# Altium PCB Notecarier-F.PcbDoc (part 1 of 3)
Units mm, origin at the board's own origin, x right, y up, seen from the top; angles counter-clockwise.
Board outline 50.8 x 103 mm, 4 copper layers (Top Layer, Mid Layer 3, Mid Layer 4, Bottom Layer), stack 1.58 mm thick; 105 components, 115 nets, 561 pads, 506 vias.
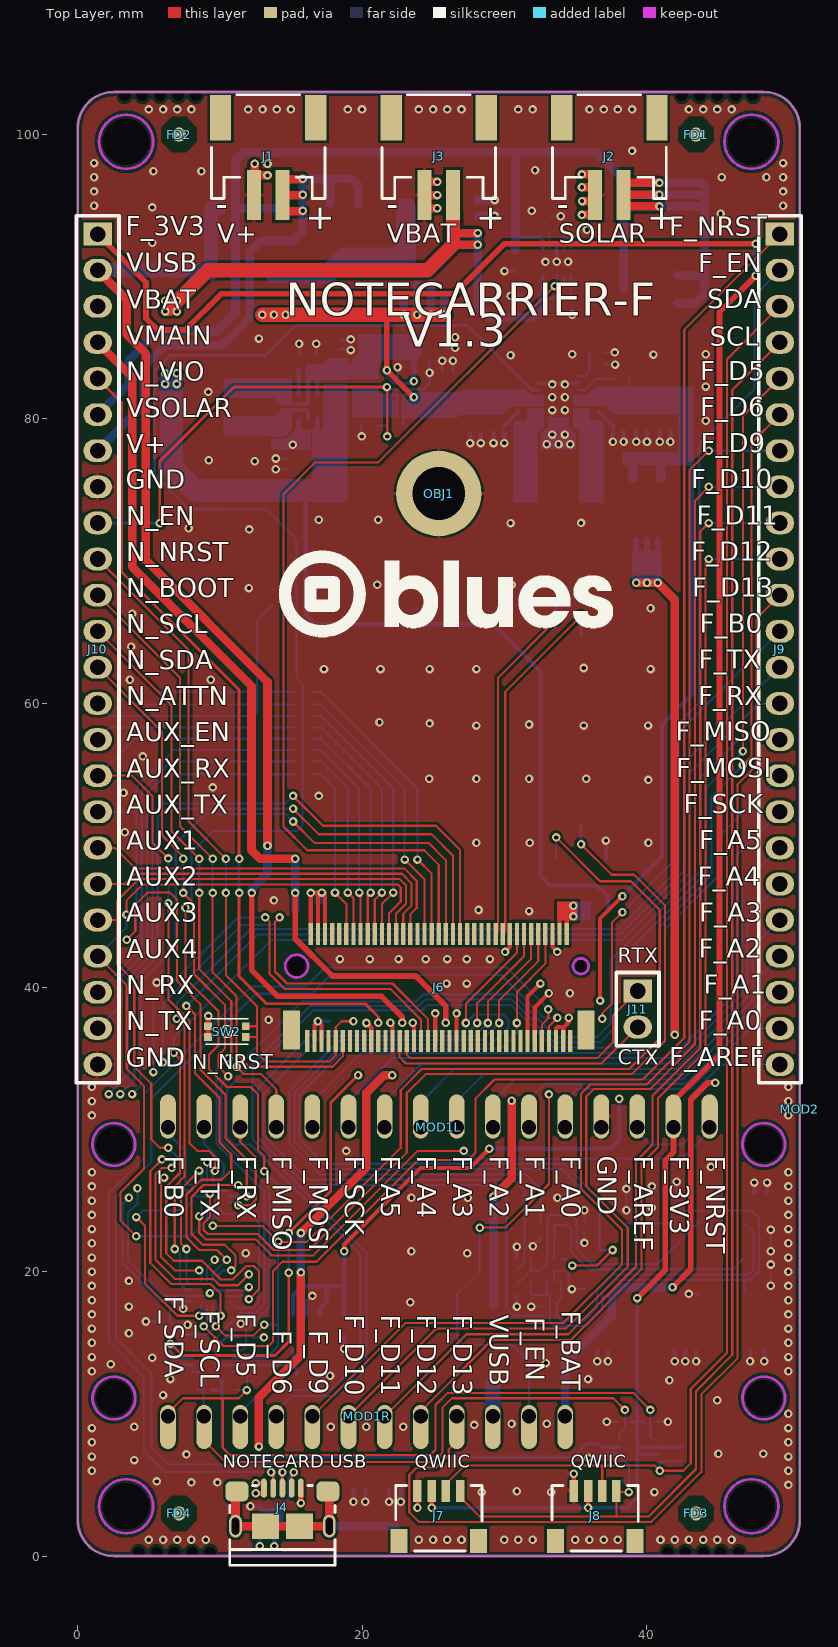
[diagram p0: Top Layer view]
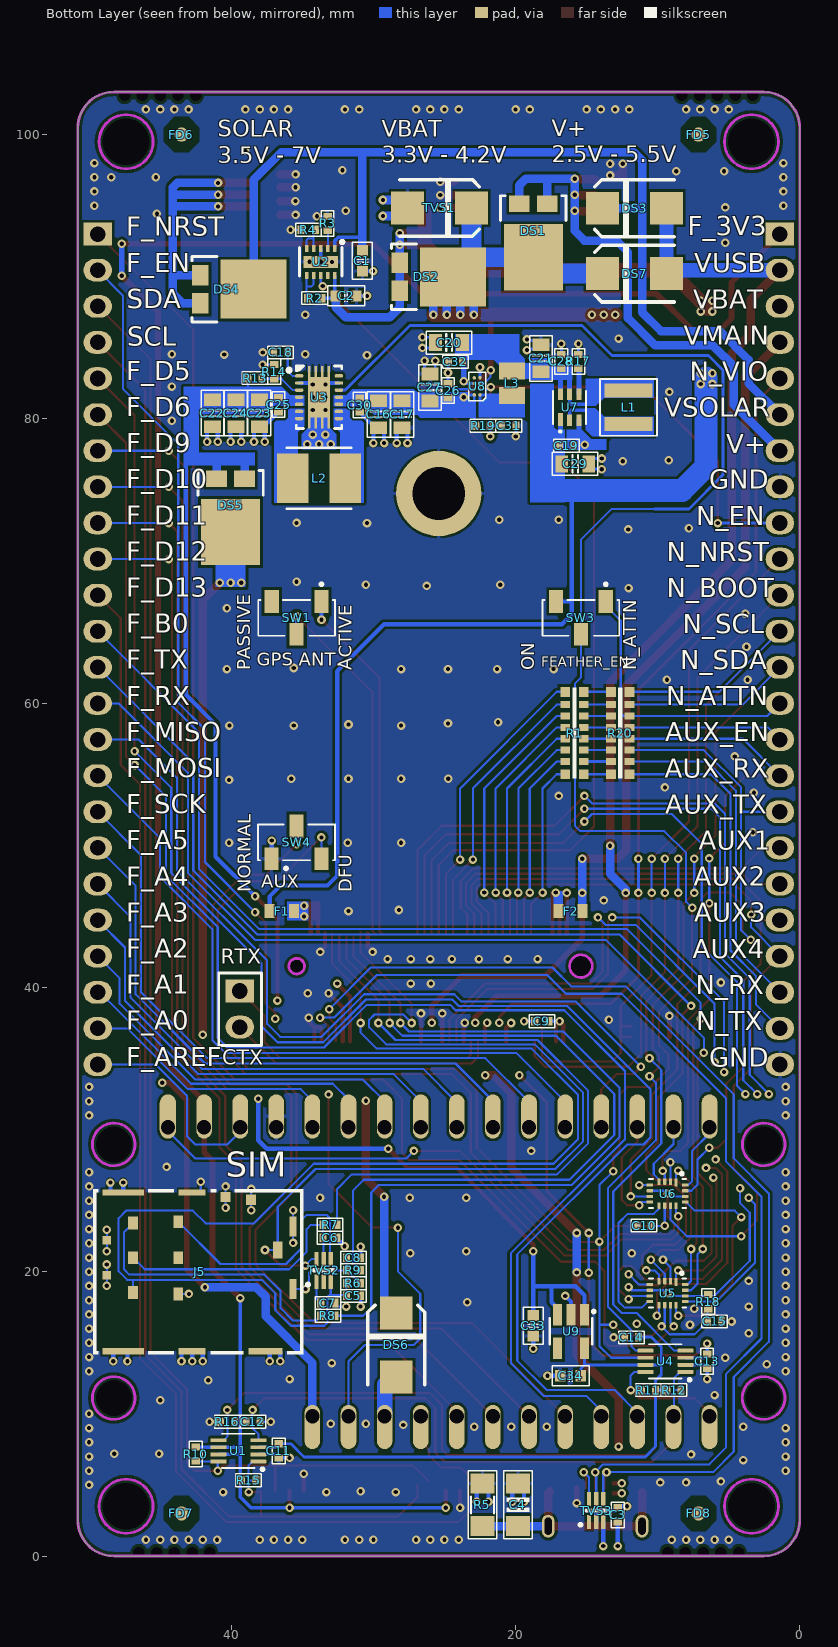
[diagram p1: Bottom Layer view, seen from below]
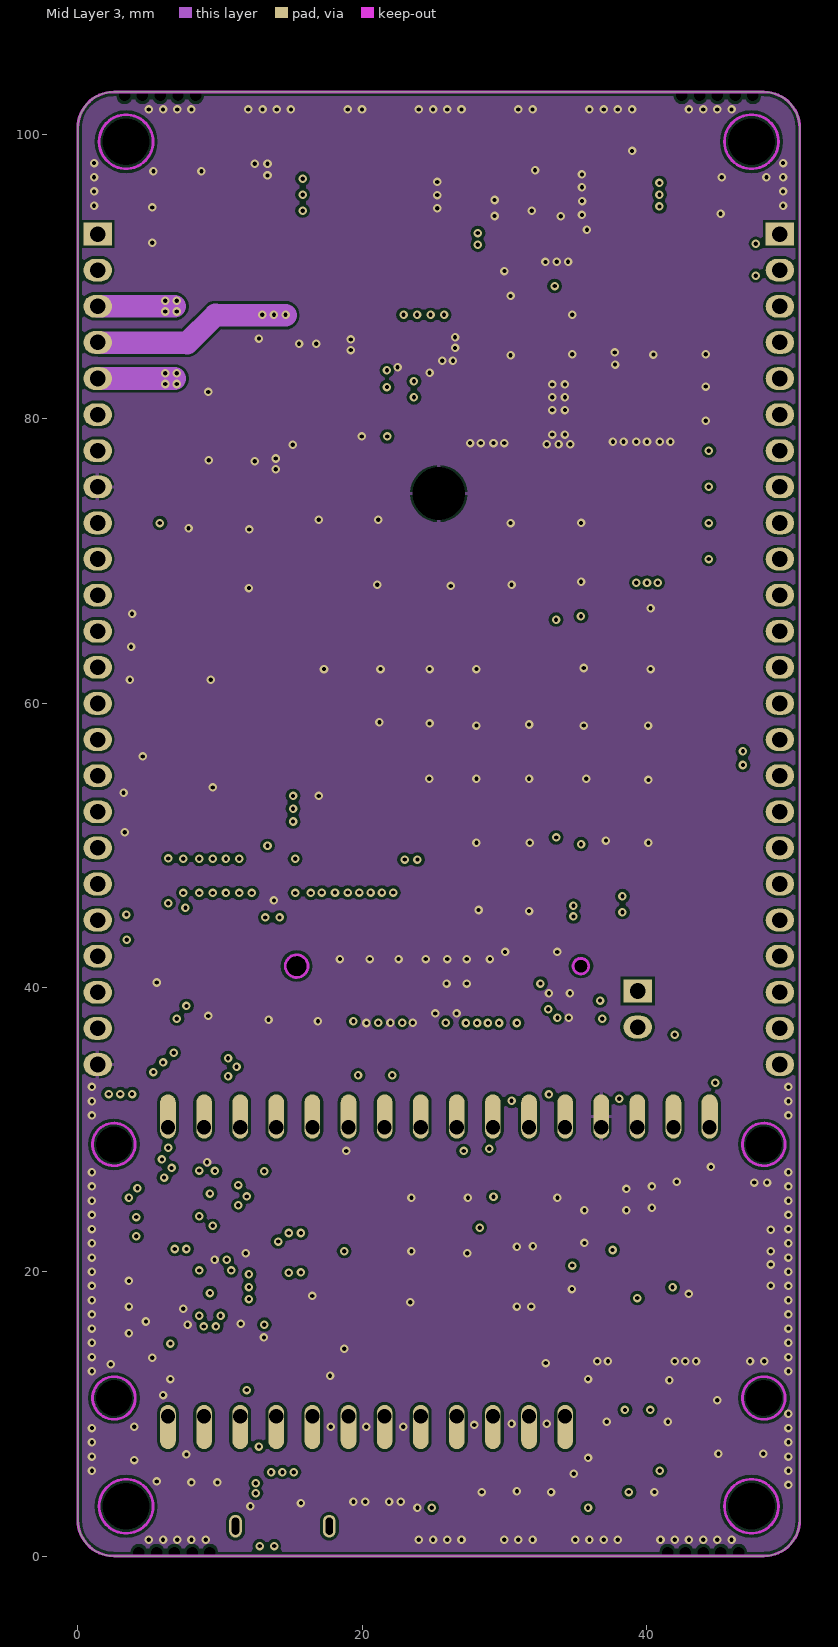
[diagram p2: Mid Layer 3]
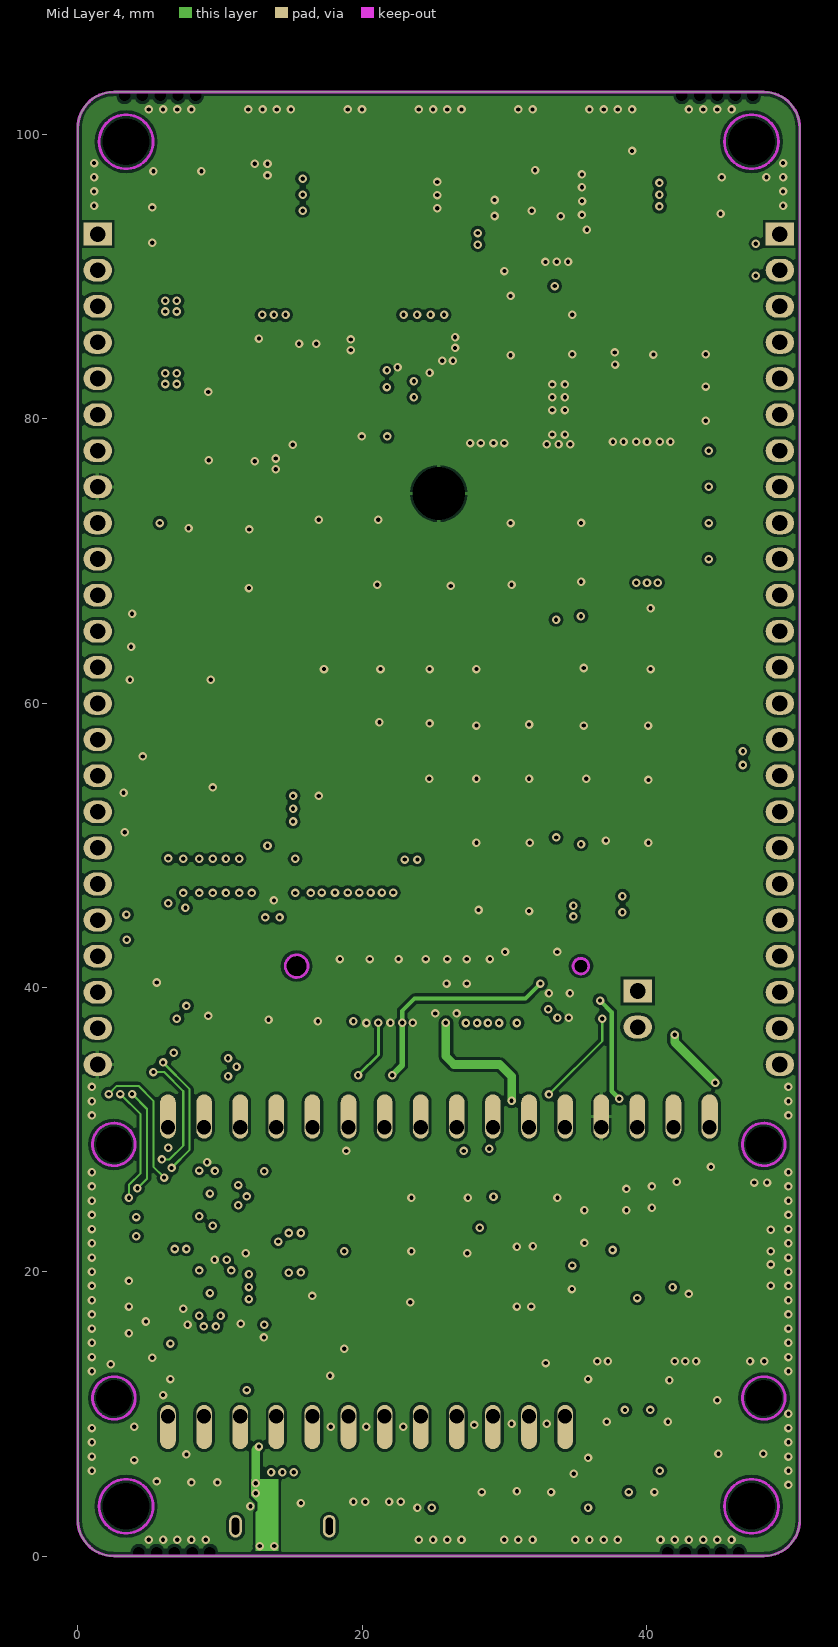
[diagram p3: Mid Layer 4]

## Layer stack, top to bottom
Top Solder: solder mask 0.0152, Solder Resist, Dk 3.5
Top Layer: signal copper 0.0483
Top Prepreg: prepreg 0.1092, Dk 4.2
Mid Layer 3: signal copper 0.0356
Bottom Core: core 1.1938, Dk 4.2
Mid Layer 4: signal copper 0.0356
Bottom Prepreg: prepreg 0.1092, Dk 4.2
Bottom Layer: signal copper 0.0483
Bottom Solder: solder mask 0.0152, Solder Resist, Dk 3.5

## Board outline
0,2.54 ccw(c2.54,2.54) 2.54,0 48.26,0 ccw(c48.26,2.54) 50.8,2.54 50.8,100.46 ccw(c48.26,100.46) 48.26,103 2.54,103 ccw(c2.54,100.46) 0,100.46

## Design rules (kind name [scope] priority, off if disabled: settings)
Clearance "Clearance Polygon" [InPoly] p1: gap=0.2
Clearance [All] p2: gap=0.1
ComponentClearance ComponentClearance_SidePins [HasFootprint('PCB_Contact_side_0.7mm') vs HasFootprint('PCB_Contact_side_0.7mm')] p1: gap=0 collisioncheckmode=3 verticalgap=0 showdistances=FALSE
ComponentClearance ComponentClearance_GNSSantenna [InComponent('R38') vs InComponent('ANT3')] p2: gap=0 collisioncheckmode=3 verticalgap=0 showdistances=FALSE
ComponentClearance ComponentClearance_SW_jumper [InComponent('R28') vs InComponent('S1')] p3: gap=0 collisioncheckmode=3 verticalgap=0 showdistances=FALSE
ComponentClearance ComponentClearance_Shield [InComponent('SHIELD1')] p4: gap=0 collisioncheckmode=3 verticalgap=0 showdistances=FALSE
ComponentClearance ComponentClearance_PCBAntena [(HasFootprint('ANTENNA 2.4 GHZ PCB MICRO SIZE') or HasFootprint('Fiducial mark 1mm'))] p5: gap=0 collisioncheckmode=3 verticalgap=0 showdistances=FALSE
ComponentClearance [All] p6: gap=0.1 collisioncheckmode=3 verticalgap=0.254 showdistances=FALSE
DiffPairsRouting [All] p1: maxlimit=0.229 minlimit=0.127 mostfreqgap=0.229 toplayer_mingap=0.229 toplayer_minwidth=0.178 toplayer_maxwidth=0.178 toplayer_prefwidth=0.178 midlayer1_maxgap=0.127 midlayer1_prefgap=0.127 midlayer1_minwidth=0.084 midlayer1_maxwidth=0.084 midlayer1_prefwidth=0.084 midlayer2_maxgap=0.127 midlayer2_prefgap=0.127 midlayer2_minwidth=0.084 midlayer2_maxwidth=0.084 midlayer2_prefwidth=0.084 bottomlayer_mingap=0.229 bottomlayer_minwidth=0.178 bottomlayer_maxwidth=0.178 bottomlayer_prefwidth=0.178 maxuncoupledlength=12.7
FabricationTestPointUsage TestPointUsage [All] p1: valid=0 allowmultiple=FALSE
FabricationTestpoint Testpoint [All] p1: side=3 testpointundercomponent=TRUE minsize=1.016 maxsize=2.54 preferedsize=1.524 minholesize=0 maxholesize=1.016 preferedholesize=0.813 testpointgrid=0.025 allowsidetop=TRUE allowsidebottom=TRUE usegrid=TRUE gridtolerance=0
HoleSize [All] p1: absolutevalues=TRUE maxlimit=5.08 minlimit=0.1 maxpercent=80.000 minpercent=20.000
HoleToHoleClearance [All] p1: gap=0.2 allowstackedmicrovias=TRUE
MinimumSolderMaskSliver [All] p1: minsoldermaskwidth=0
NetAntennae [InNet('NetA1_1')] p1: netantennaetolerance=500
PasteMaskExpansion [All] p1: expansion=-0.025
PlaneClearance [All] p1: clearance=0.3
PlaneConnect PlaneConnect_Via [Isvia] p1: planeconnectstyle=Direct reliefexpansion=0.508 reliefentries=4 reliefconductorwidth=0.254 reliefairgap=0.254
PlaneConnect [All] p2: planeconnectstyle=Relief reliefexpansion=0.2 reliefentries=4 reliefconductorwidth=0.25 reliefairgap=0.2
PolygonConnect PolygonConnect_Shield [HasFootprint('SHIELD CUSTOM NRF52832 MODULE')] p1: connectstyle=Direct reliefconductorwidth=0.254 reliefentries=4 polygonreliefangle="90 Angle" airgapwidth=0.254
PolygonConnect PolygonConnect_Via [IsVia] p2: connectstyle=Direct reliefconductorwidth=0.254 reliefentries=4 polygonreliefangle="90 Angle" airgapwidth=0.254
PolygonConnect [All] p3: connectstyle=Relief reliefconductorwidth=0.254 reliefentries=4 polygonreliefangle="90 Angle" airgapwidth=0.15
RoutingVias [All] p1: holewidth=0.2 width=0.4 viastyle="Through Hole" minholewidth=0.1 minwidth=0.3 maxholewidth=0.3 maxwidth=0.6
ShortCircuit "PCB Antenna" [(HasFootprint('Antenna 2.4 GHz PCB Small Size'))] p1: allowed=TRUE
ShortCircuit [All] p2: allowed=FALSE
SilkToSilkClearance [All] p1: silktosilkclearance=0.01
SilkToSolderMaskClearance SilkscreenOverComponentPads [IsPad] p1: minsilkscreentomaskgap=0.1 clearancetoexposedcopper=TRUE
SolderMaskExpansion [All] p1: expansion=0.1
Width [All] p1: maxlimit=2 minlimit=0.1 preferedwidth=0.15 checkconnectedcopper=TRUE
16 further rules are at their usual default settings.

## Classes and differential pairs
differential pair D: +D_P -D_N

## Components (designator, comment, footprint, x,y, rotation, side; value= is the part's Value field where it differs from the comment)
C1 "1u" C-0603 30.77,91.125 r90 bottom
C2 "1u" C-0603 31.925,88.65 r0 bottom
C3 "100n" C-0402 12.8,2.9 r90 bottom
C4 "10n/1000V" C-1206 19.826,3.6 r90 bottom
C5 "100n" C-0402 31.4,18.3 r0 bottom
C6 "33p" C-0402 33.05,22.4 r0 bottom
C7 "33p" C-0402 33.2,17.8 r0 bottom
C8 "33p" C-0402 31.4,21 r0 bottom
C9 "100n" C-0402 18.15,37.625 r0 bottom
C10 "100n" C-0402 10.95,23.25 r180 bottom
C11 "100n" C-0402 36.65,7.4 r270 bottom
C12 "100n" C-0402 38.475,9.45 r180 bottom
C13 "100n" C-0402 6.525,13.7 r270 bottom
C14 "100n" C-0402 11.85,15.375 r0 bottom
C15 "100n" C-0402 6,16.5 r0 bottom
C16 "22u" C-0805 29.625,80.325 r90 bottom
C17 "22u" C-0805 27.975,80.325 r90 bottom
C18 "100n" C-0402 36.525,84.675 r180 bottom
C19 "100n" C-0402 16.425,78.115 r0 bottom
C20 "22u" C-0805 24.675,85.365 r0 bottom
C21 "22u" C-0805 18.2,84.265 r270 bottom
C22 "22u" C-0805 41.325,80.4 r270 bottom
C23 "22u" C-0805 38.025,80.4 r270 bottom
C24 "22u" C-0805 39.675,80.4 r270 bottom
C25 "100n" C-0402 36.675,81 r90 bottom
C26 "100n" C-0402 24.75,81.99 r270 bottom
C27 "22u" C-0805 26.025,82.215 r270 bottom
C28 "100n" C-0402 16.775,84.04 r270 bottom
C29 "22u" C-0805 15.8,76.84 r180 bottom
C30 "100n" C-0402 30.975,80.975 r90 bottom
C31 "100n" C-0402 20.475,79.515 r0 bottom
C32 "100n" C-0402 24.225,84.015 r180 bottom
C33 "1u" C-0603 18.75,16.2 r90 bottom
C34 "1u" C-0603 16.125,12.675 r180 bottom
DS1 "FSV1045V" TO277-3 18.75,92.375 r0 bottom
DS2 "FSV1045V" TO277-3 25.4,90 r270 bottom
DS3 "STPS3H100U" SMB 11.625,94.825 r0 bottom
DS4 "FSV1045V" TO277-3 39.425,89.125 r270 bottom
DS5 "FSV1045V" TO277-3 40.05,73.05 r0 bottom
DS6 "STPS3H100U" SMB 28.385,14.85 r90 bottom
DS7 "STPS3H100U" SMB 11.625,90.225 r0 bottom
F1 "SF-0603F150-2" FS-0603 36.45,45.375 r180 bottom
F2 "046703.5NR" FS-0603 16.125,45.375 r0 bottom
FD1 "Fiducial mark" "Fiducial mark 1mm" 43.5,100 r0 top
FD2 "Fiducial mark" "Fiducial mark 1mm" 7.125,100 r0 top
FD3 "Fiducial mark" "Fiducial mark 1mm" 43.5,3 r0 top
FD4 "Fiducial mark" "Fiducial mark 1mm" 7.125,3 r0 top
FD5 "Fiducial mark" "Fiducial mark 1mm" 7.125,100 r180 bottom
FD6 "Fiducial mark" "Fiducial mark 1mm" 43.5,100 r180 bottom
FD7 "Fiducial mark" "Fiducial mark 1mm" 43.5,3 r180 bottom
FD8 "Fiducial mark" "Fiducial mark 1mm" 7.125,3 r180 bottom
J1 "S2BPHSM4TBLFSN" "JST S2B-PH-SM4-TB" 13.4,100 r0 top locked
J2 "S2BPHSM4TBLFSN" "JST S2B-PH-SM4-TB" 37.4,100 r0 top locked
J3 "S2BPHSM4TBLFSN" "JST S2B-PH-SM4-TB" 25.4,100 r0 top locked
J4 "10118193-0001LF" "FCI USB 10118193-0001LF" 14.4,2.15 r180 top locked
J5 "SF72S006VBDR2500" J-NANOSIM-SF72S006VBA 42.85,20 r270 bottom locked
J6 "MDT420E01001" J-75-0050-MOS-M2 25.4,40 r180 top locked
J7 "SM04B-SRSS-TB(LF)(SN)" "JST SM04B-SRSS-TB" 25.4,2.557 r180 top locked
J8 "SM04B-SRSS-TB(LF)(SN)" "JST SM04B-SRSS-TB" 36.4,2.557 r180 top locked
J9 "CES-124-01-S-S" CES-124-01-S-S 49.4,93 r0 top locked
J10 "CES-124-01-S-S" CES-124-01-S-S 1.4,93 r0 top locked
J11 "CES-102-01-S-S" CONN_02 39.394,39.751 r0 top
L1 "2u2" IND_XFL4020-222MEC 12.05,80.815 r90 bottom
L2 "1.5uH" VCHA042A-1R5MS6 33.825,75.825 r180 bottom
L3 "2u2" 1285AS-H-2R2M=P2-INDC2016X100N 20.25,82.515 r270 bottom
MOD1L "CES-116-01-L-S" 16PIN_254MM 44.45,30.16 r180 top locked
MOD1R "CES-112-01-L-S" 12PIN_254MM 34.29,9.84 r180 top locked
MOD2 "Feather Module" BLUES_WIRELESS_SWAN_2-54_HEADERS 50.8,31.43 r180 top locked
OBJ1 "9774025151R" DIST-WASMSIM0250 25.4,74.75 r0 top locked
R1 "100R" RESCAXS80P640X160X50-16N 15.85,57.9 r90 bottom
R2 "10k" R-0402 34.125,88.5 r180 bottom
R3 "470R" R-0402 33.225,93.75 r270 bottom
R4 "10k" R-0402 34.575,93.3 r180 bottom
R5 "1M" R-1206 22.326,3.6 r90 bottom
R6 "15k" R-0402 31.4,19.2 r0 bottom
R7 "22R" R-0402 33.05,23.3 r0 bottom
R8 "22R" R-0402 33.2,16.9 r0 bottom
R9 "22R" R-0402 31.4,20.1 r0 bottom
R10 "10k" R-0402 42.5,7.175 r90 bottom
R11 "10k" R-0402 10.65,11.675 r180 bottom
R12 "10k" R-0402 8.85,11.675 r0 bottom
R13 "1M1" R-0402 38.325,82.875 r0 bottom
R14 "180k" R-0402 36.975,83.325 r270 bottom
R15 "10k" R-0402 38.775,5.325 r0 bottom
R16 "10k" R-0402 40.275,9.45 r0 bottom
R17 "82k" R-0402 15.575,84.04 r90 bottom
R18 "100k" R-0402 6.45,17.9 r270 bottom
R19 "10M" R-0402 22.275,79.515 r0 bottom
R20 "100R" RESCAXS80P640X160X50-16N 12.625,57.9 r90 bottom
SW1 "CJS-1200TA" SW_CJS-1200TA 35.4,66 r0 bottom
SW2 "EVP-BB2A9B000" SW_EVP-BB2A9B000 10.5,36.9 r180 top
SW3 "CJS-1200TA" SW_CJS-1200TA 15.4,66 r0 bottom
SW4 "CJS-1200TA" SW_CJS-1200TA 35.408,50.206 r180 bottom
TVS1 "SM6T6V8A" SMB 25.35,94.84 r180 bottom
TVS2 "PESD5V0L5UV,125" SOT666 33.5,20.1 r180 bottom
TVS3 "PESD5V0L5UV,125" SOT666 14.325,3.2 r180 bottom
U1 "TXS0102DCUR" SOP50P310X90-8N 39.5,7.4 r0 bottom
U2 "BQ24210DQCT" WSON10-EXP 33.703,91.047 r270 bottom
U3 "TPS63020DSJR" "TI PVSON-14 DSJ" 33.825,81.525 r180 bottom
U4 "TXS0102DCUR" SOP50P310X90-8N 9.45,13.7 r0 bottom
U5 "DGQ2788AEN-T1-GE4" QFN40P260X180X60-16N 9.3,18.5 r270 bottom
U6 "DGQ2788AEN-T1-GE4" QFN40P260X180X60-16N 9.3,25.5 r270 bottom
U7 "MAX17225ELT+" MAX17225ELT+UDFN 16.85,79.915 r90 bottom
U8 "TPS62748YFPT" TPS62748YFPT-DSBGA4x2 22.5,81.69 r0 bottom
U9 "AP2139AK-3.3TRG1" SOT-23-5(M5) 16.097,15.8 r0 bottom

## Footprints (in the part's own frame and the unit in brackets; to place one, negate y for a bottom-side part, rotate by r counter-clockwise, add the part's x,y. Pads: shape width x height; smd on the part's side, far side on the other; paste and mask are expansions set on the pad)
12PIN_254MM [mm]
  rrect100% 1.1x3.1 hole 1 copper offset 0,0.762: 1(0,0) 2(2.54,0) 3(5.08,0) 4(7.62,0) 5(10.16,0) 6(12.7,0) 7(15.24,0) 8(17.78,0) 9(20.32,0) 10(22.86,0) 11(25.4,0) 12(27.94,0)
  body extent -1.27,-1.52 29.21,1.52, height 5.09
16PIN_254MM [mm]
  rrect100% 1.16x3.1 hole 1 copper offset 0,-0.762: 1(0,0)
  rrect100% 1.1x3.1 hole 1 copper offset 0,-0.762: 2(2.54,0) 3(5.08,0) 4(7.62,0) 5(10.16,0) 6(12.7,0) 7(15.24,0) 8(17.78,0) 9(20.32,0) 10(22.86,0) 11(25.4,0) 12(27.94,0) 13(30.48,0) 14(33.02,0) 15(35.56,0) 16(38.1,0)
  body extent -1.27,-1.52 39.37,1.52, height 5.09
1285AS-H-2R2M=P2-INDC2016X100N [mm]
  rect 1.2x1.82 smd: 1(-0.86,0) 2(0.86,0)
  body extent -1,-0.8 1,0.8, height 1.2
BLUES_WIRELESS_SWAN_2-54_HEADERS [mm]
C-0402 [mm] "Chip Capacitor; Body 1 x 0.5 mm (LxW typ)"
  rect 0.5x0.6 smd paste-0.025 mask+0.05: 1(-0.5,0) 2(0.5,0)
  silkscreen extent -0.9,-0.45 0.9,0.45, body extent -0.5,-0.28 0.5,0.28, height 0.5
C-0603 [mm] "Chip Capacitor; Body 1.6 x 0.8 mm (LxW typ)"
  rect 0.75x0.8 smd paste-0.025: 1(-0.725,0) 2(0.725,0)
  silkscreen extent -1.3,-0.7 1.3,0.7, body extent -0.8,-0.48 0.8,0.44, height 0.8
C-0805 [mm] "Chip Capacitor; Body 2.0 x 1.2 mm (LxW typ)"
  rect 0.9x1.2 smd paste-0.025: 1(-0.95,0) 2(0.95,0)
  silkscreen extent -1.6,-0.8 1.6,0.8, body extent -1,-0.6 1,0.6, height 0.94
C-1206 [mm] "Chip Capacitor; Body 3.2 x 1.6 mm (LxW typ)"
  rect 1.4x1.7 smd paste-0.025 mask+0.08: 1(-1.5,0) 2(1.5,0)
  silkscreen extent -2.4,-1 2.4,1, body extent -1.65,-0.8 1.55,0.8, height 1.05
CES-124-01-S-S [mm] "24x1 0.1\" female headers"
  rect 2x1.6 hole 1.1: 1(0,0)
  oval 2x1.6 hole 1.1: 2(0,-2.54) 3(0,-5.08) 4(0,-7.62) 5(0,-10.16) 6(0,-12.7) 7(0,-15.24) 8(0,-17.78) 9(0,-20.32) 10(0,-22.86) 11(0,-25.4) 12(0,-27.94) 13(0,-30.48) 14(0,-33.02) 15(0,-35.56) 16(0,-38.1) 17(0,-40.64) 18(0,-43.18) 19(0,-45.72) 20(0,-48.26) 21(0,-50.8) 22(0,-53.34) 23(0,-55.88) 24(0,-58.42)
  silkscreen extent -1.5,-59.7 1.5,1.3, body extent -1.52,-59.7 1.52,1.26, height 5.09
CONN_02 [mm] "0.1\" 2 PIN header"
  rect 2x1.6 hole 1.1: 1(0,0)
  oval 2x1.6 hole 1.1: 2(0,-2.54)
  silkscreen extent -1.5,-3.84 1.5,1.3
DIST-WASMSIM0250 [mm]
  round 6 / inner round 1.524 / far side round 6 hole 3.7: 1(0,0)
  body extent -2.55,-2.55 2.55,2.55, height 2.5
"FCI USB 10118193-0001LF" [mm] "USB 2.0 Type B Micro"
  oval 0.4x1.35 smd: 1(1.3,-2.625) 2(0.65,-2.625) 3(0,-2.625) 4(-0.65,-2.625) 5(-1.3,-2.625)
  oval 0.9x1.6 hole 0.5 slot 1.2 at 90 deg paste+0.252: S(-3.3,0.05) S(3.3,0.05)
  oval 0.9x1.6 on Top Paste paste+0.252: S(-3.3,0.05) S(3.3,0.05)
  rrect50% 1.6x1.4 smd: S(-3.2,-2.4) S(3.2,-2.4)
  rect 1.9x1.8 smd: S(-1.2,0.05) S(1.2,0.05)
  silkscreen extent -3.7,-2.8 3.7,2.8, body extent -3.93,-2.9 3.93,2.76, height 2.78
"Fiducial mark 1mm" [mm] "1 mm diameter"
  round 1 smd paste+0 mask+0.6: 1(0,0)
  Top Layer pour cut-out: -1.25,0.5 -0.5,1.25 0.5,1.25 1.25,0.5 1.25,-0.5 0.5,-1.25 -0.5,-1.25 -1.25,-0.5
FS-0603 [mm]
  rect 0.7x1 smd: 1(-0.85,0) 2(0.85,0)
  body extent -0.8,-0.43 0.8,0.43, height 0.86
IND_XFL4020-222MEC [mm]
  rect 0.98x3.4 smd: 1(-1.185,0) 2(1.185,0)
  silkscreen extent -2,-2 2,2
J-75-0050-MOS-M2 [mm]
  rect 0.3x1.55 smd: 1(-9.25,3.775) 2(-9,-3.775) 3(-8.75,3.775) 4(-8.5,-3.775) 5(-8.25,3.775) 6(-8,-3.775) 7(-7.75,3.775) 8(-7.5,-3.775) 9(-7.25,3.775) 10(-7,-3.775) 11(-6.75,3.775) 12(-6.5,-3.775) 13(-6.25,3.775) 14(-6,-3.775) 15(-5.75,3.775) 16(-5.5,-3.775) 17(-5.25,3.775) 18(-5,-3.775) 19(-4.75,3.775) 20(-4.5,-3.775) 21(-4.25,3.775) 22(-4,-3.775) 23(-3.75,3.775) 24(-3.5,-3.775) 25(-3.25,3.775) 26(-3,-3.775) 27(-2.75,3.775) 28(-2.5,-3.775) 29(-2.25,3.775) 30(-2,-3.775) 31(-1.75,3.775) 32(-1.5,-3.775) 33(-1.25,3.775) 34(-1,-3.775) 35(-0.75,3.775) 36(-0.5,-3.775) 37(-0.25,3.775) 38(0,-3.775) 39(0.25,3.775) 40(0.5,-3.775) 41(0.75,3.775) 42(1,-3.775) 43(1.25,3.775) 44(1.5,-3.775) 45(1.75,3.775) 46(2,-3.775) 47(2.25,3.775) 48(2.5,-3.775) 49(2.75,3.775) 50(3,-3.775) 51(3.25,3.775) 52(3.5,-3.775) 53(3.75,3.775) 54(4,-3.775) 55(4.25,3.775) 56(4.5,-3.775) 57(4.75,3.775) 58(5,-3.775) 59(5.25,3.775) 60(5.5,-3.775) 61(5.75,3.775) 62(6,-3.775) 63(6.25,3.775) 64(6.5,-3.775) 65(6.75,3.775) 66(7,-3.775) 67(7.25,3.775) 68(7.5,-3.775) 69(7.75,3.775) 70(8,-3.775) 71(8.25,3.775) 72(8.5,-3.775) 73(8.75,3.775) 74(9,-3.775) 75(9.25,3.775)
  round 0 hole 1.1 unplated: AH(-10,-1.5)
  round 0 hole 1.6 unplated: AH(10,-1.5)
  rect 1.2x2.75 smd: ""(-10.35,3) ""(10.35,3)
  body extent -10.95,-4.37 10.95,4.33, height 4.1
J-NANOSIM-SF72S006VBA [mm]
  rect 0.9x0.7 smd: 1(1.46,-4.05) 2(-0.98,-4.05) 3(-3.42,-4.05) 5(1.56,-0.88) 6(-0.98,-0.88) 7(-3.52,-0.88)
  rect 0.45x2.9 smd: 8(-5.575,-4.75) 17(5.6,-4.75)
  rect 0.45x1.9 smd: 9(-5.575,0.1) 16(5.6,0.1)
  rect 0.7x0.7 smd: 10(-5.25,2.45)
  rect 0.75x0.7 smd: 11(-5.075,4.25)
  rect 1.4x0.5 smd: 12(-3.18,7.2) 14(1.22,7.2)
  rect 1.2x0.65 smd: 13(-1.53,6.125)
  rect 0.45x2.4 smd: 15(5.6,5.25)
  rect 0.6x0.6 smd: 18(0.24,-5.9) 19(-2.2,-5.9)
  Top Layer pour cut-out: 5.6,-6.65 -5.6,-6.65 -5.6,7.7 5.6,7.7 5.6,-6.65
  silkscreen extent -5.8,-6.85 5.8,7.9, body extent -5.58,-7.43 5.64,7.62, height 1.25
"JST S2B-PH-SM4-TB" [mm] "JST PH Series 2mm pitch, side entry connector"
  rect 1x3.5 smd paste-5: 1(-1,-4.25) 2(1,-4.25)
  rect 1.5x3.2 smd: M(-3.35,1.2) M(3.35,1.2)
  silkscreen extent -4,-4.5 4,2.8, body extent -3.95,-5.6 3.95,3.01, height 5.6
"JST SM04B-SRSS-TB" [mm] "1.0mm pitch/Disconnectable Crimp style connector"
  rect 0.6x1.55 smd: 1(-1.5,-2.032) 2(-0.5,-2.032) 3(0.5,-2.032) 4(1.5,-2.032)
  rect 1.2x1.7 smd: M(-2.8,1.5) M(2.8,1.5)
  silkscreen extent -3.03,-2.41 3.03,2.2, body extent -3,-2.38 3,2.57, height 2.95
MAX17225ELT+UDFN [mm]
  rect 0.9x0.35 smd: 1(0.05,0)
  rect 0.8x0.35 smd: 2(0,-0.65) 3(0,-1.3) 4(1.83,-1.3) 5(1.83,-0.65) 6(1.83,0)
  silkscreen extent -0.88,-1.81 2.03,0.51, body extent -0.11,-1.68 1.94,0.38, height 0.79
QFN40P260X180X60-16N [mm]
  rrect25% 0.562x0.225 smd: 1(-0.795,0.6)
  rrect25% 0.463x0.22 smd: 2(-0.845,0.2) 3(-0.845,-0.2) 4(-0.845,-0.6) 9(0.845,-0.6) 10(0.845,-0.2) 11(0.845,0.2) 12(0.845,0.6)
  rrect25% 0.22x0.463 smd: 5(-0.6,-1.245) 6(-0.2,-1.245) 7(0.2,-1.245) 8(0.6,-1.245) 13(0.6,1.245) 14(0.2,1.245) 15(-0.2,1.245) 16(-0.6,1.245)
  silkscreen extent -1.5,-1.3 1.02,1.3, body extent -0.9,-1.3 0.9,1.3, height 0.55
R-0402 [mm] "Chip Resistor; Body 1 x 0.5 mm (LxW typ)"
  rect 0.5x0.6 smd paste-0.025 mask+0.05: 1(-0.5,0) 2(0.5,0)
  silkscreen extent -0.9,-0.45 0.9,0.45, body extent -0.5,-0.25 0.5,0.25, height 0.38
R-1206 [mm] "Chip Resistor; Body 3.1 x 1.6 mm (LxW typ)"
  rect 1.4x1.7 smd paste-0.025 mask+0.08: 1(-1.5,0) 2(1.5,0)
  silkscreen extent -2.4,-1 2.4,1, body extent -1.55,-0.8 1.55,0.8, height 0.65
RESCAXS80P640X160X50-16N [mm] "Resistor network 8x0.0625W"
  rect 0.7x0.7 smd mask+0.05: 1(-2.9,-0.65) 8(2.9,-0.65) 9(2.9,0.65) 16(-2.9,0.65)
  rect 0.5x0.7 smd mask+0.05: 2(-2,-0.65) 3(-1.2,-0.65) 4(-0.4,-0.65) 5(0.4,-0.65) 6(1.2,-0.65) 7(2,-0.65) 10(2,0.65) 11(1.2,0.65) 12(0.4,0.65) 13(-0.4,0.65) 14(-1.2,0.65) 15(-2,0.65)
  silkscreen extent -3.2,-0.15 3.2,0.15, body extent -3.2,-0.8 3.2,0.8, height 0.51
SMB [mm] "DO-214-AA/SMB; 2 C-Bend Leads; Body 5.3 x 3.6 mm, inc. leads (LxW)"
  rect 2.3x2.3 smd: 1(2.25,0) 2(-2.25,0)
  silkscreen extent -2.8,-2 2.8,2, body extent -2.79,-1.98 2.79,1.98, height 2.64
SOP50P310X90-8N [mm]
  rrect25% 1.12x0.27 smd: 1(-1.405,0.75) 2(-1.405,0.25) 3(-1.405,-0.25) 4(-1.405,-0.75) 5(1.405,-0.75) 6(1.405,-0.25) 7(1.405,0.25) 8(1.405,0.75)
  silkscreen extent -1.8,-1.2 1.15,1.4, body extent -1.55,-1 1.55,1, height 0.9
SOT666 [mm]
  rect 0.3x0.99 smd: 1(-0.5,-0.805) 2(0,-0.805) 3(0.5,-0.805) 4(0.5,0.805) 5(0,0.805) 6(-0.5,0.805)
  silkscreen extent -1.18,-1.08 0.7,0, body extent -0.79,-0.8 0.8,0.8, height 0.6
SOT-23-5(M5) [mm]
  rect 0.6x1.5 smd: 1(-0.95,-1.175) 2(0,-1.175) 3(0.95,-1.175) 4(0.95,1.175) 5(-0.95,1.175)
  silkscreen extent -1.7,-1.5 1.5,0.9, body extent -1.5,-1.5 1.5,1.5, height 1.45
SW_CJS-1200TA [mm]
  rect 1x1.6 smd: 1(-1.75,-1.15) 2(0,1.15) 3(1.75,-1.15)
  silkscreen extent -2.7,-2.46 2.7,1.25, body extent -2.7,-1.4 2.7,1.4, height 2.5
SW_EVP-BB2A9B000 [mm] "SWITCH TACTILE SPST-NO 0.02A 15V SMD"
  rect 0.55x0.55 smd mask+0.1: 1(-1.325,-0.375) 1(-1.325,0.375) 2(1.325,-0.375) 2(1.325,0.375)
  Top Layer pour cut-out: -0.95,0.75 0.95,0.75 0.95,-0.75 -0.95,-0.75
  silkscreen extent -1.5,-0.9 1.5,0.9, body extent -1.5,-0.9 1.5,0.9, height 0.51
"TI PVSON-14 DSJ" [mm] "VSON, 14-Leads, Body 3.00x4.00mm, Pitch 0.50mm, Thermal Pad 1.58x2.85mm, IPC Medium Density"
  oval 0.6x0.24 smd: 1(-1.4,1.5) 2(-1.4,1) 3(-1.4,0.5) 4(-1.4,0) 5(-1.4,-0.5) 6(-1.4,-1) 7(-1.4,-1.5) 8(1.4,-1.5) 9(1.4,-1) 10(1.4,-0.5) 11(1.4,0) 12(1.4,0.5) 13(1.4,1) 14(1.4,1.5)
  rect 0.2x0.775 smd: 15(-0.69,-1.8) 15(-0.69,1.8) 15(-0.23,-1.8) 15(-0.23,1.8) 15(0.23,-1.8) 15(0.23,1.8) 15(0.69,-1.8) 15(0.69,1.8)
  rect 1.58x2.85 smd: 15(0,0)
  silkscreen extent -2.23,-2.2 1.6,2.21, body extent -1.58,-2.07 1.58,2.08, height 1
TO277-3 [mm]
  rect 1.45x1.15 smd: 1(0.985,-2.75) 2(-0.985,-2.75)
  rect 4.15x4.65 smd: 3(0,1)
  silkscreen extent -2.3,-3.32 2.3,-1.58, body extent -2.31,-3.32 2.32,3.33, height 1.2
TPS62748YFPT-DSBGA4x2 [mm]
  round 0.245 smd: A1(0,0) A2(0.4,0) B1(0,-0.4) B2(0.4,-0.4) C1(0,-0.8) C2(0.4,-0.8) D1(0,-1.2) D2(0.4,-1.2)
  silkscreen extent -0.4,-1.6 0.8,0.4, body extent -0.3,-1.5 0.7,0.3, height 0.69
VCHA042A-1R5MS6 [mm] "1.5uH Precision Wire Wound Inductor, 2-Leads, Body 4.20x4.00mm, IPC Medium Density"
  rect 2.2x3.5 smd: 1(-1.85,0) 2(1.85,0)
  silkscreen extent -2.25,-2.15 2.25,2.15, body extent -2.2,-2 2.2,2, height 2.2
WSON10-EXP [mm]
  rect 0.5x0.25 smd: 1(-0.95,1) 2(-0.95,0.5) 3(-0.95,0) 4(-0.95,-0.5) 5(-0.95,-1) 6(0.95,-1) 7(0.95,-0.5) 8(0.95,0) 9(0.95,0.5) 10(0.95,1)
  rect 0.84x2.4 smd: 11(0,0)
  silkscreen extent -1.5,-1.5 1,1.6, body extent -1,-1.5 1,1.5, height 0.8

## Part data
C1 C2 C33 C34: library part C0603-1u-25V-X5R, "Capacitor ceramic 1u ±10% X5R 25V"
C3 C5 C9 C10 C11 C12 C13 C14 C15 C18 C19 C25 C26 C28 C30 C31 C32: library part C0402-100n-16V-X7R, "Capacitor ceramic 100n ±10% X7R 16V 0402"
C4: library part "C1206-10n-1000V-X7R - CS1206KKX7RCBB103", "Capacitor ceramic 10n ±10% X7R 1000V 1206"
C6 C7 C8: library part C0402-33p-50V-C0G-5, "Capacitor ceramic 33p ±5% C0G 50V 0402"
C16 C17 C20 C21 C22 C23 C24 C27 C29: library part C0805-22u-16V-X5R, "Capacitor ceramic 22u ±10% X5R 16V 0805"
DS1 DS2 DS4 DS5: library part "SCHOTTKY - FSV1045V - 10A/45V", "DIODO SCHOTTKY 10A 45V FSV1045V TO277-3 SMT"
DS3 DS6 DS7: library part "SCHOTTKY-STPS3H100U - 3A/100V", "DIODO SCHOTTKY 3A 100V STPS3H100U SMB SMT"
F1: library part "RAPIDO - SF-0603F150-2-1.5A/32V", "FUSIBILE RAPIDO 1.5A 32V 0603 SF-0603F150-2 BOURNS SMT"
F2: "Fuse Chip Very Fast Acting 3.5A 32V SMD Solder Pad 0603 T/R CSA"
J1 J2 J3: "PH SMT SIDE ENTRY HDR 2W"
J4: library part "USB 2.0 Type B Micro", "CONN RCPT USB2.0 MICRO B SMD R/A"
J5: library part "NANOSIM - J-NANOSIM-SF72S006VBA", "CONN. NANOSIM 8P F/90° PUSH-PUSH SF72S006VBAR2500 JAE ELECTRONICS SMT"
J6: library part "AMPHENOL-75 - M-2 KEY E_13", "CONN. M.2 75P M/90° P=0.5 MDT420E01001 AMPHENOL SMT"
J7 J8: "CONN HEADER SH 4POS SIDE 1MM TIN"
J9: library part SIDECON, "24x1 0.1\" pitch half height female header"
J10: library part SIDECON_N, "24x1 0.1\" pitch half height female header"
J11: library part CONN_02, "0,1\" 2 PIN Header"
L1: library part XFL4020-222MEC, "Power Inductors - SMD 2.2Uh Shld 8A 23.5mOhms AECQ2"
L2: library part VCHA042A-1R5MS6, "Fixed Ind 1.5UH 7.3A 15.4 Mohm"
L3: library part 1285AS-H-2R2M=P2, "FIXED IND 2.2UH 1.5A 204MOHM SMD"
MOD1L: library part SOCKET_LFB_16, "Socket 16-Pin, 0.100 in"
MOD1R: library part SOCKET_LFB_12, "Socket 12-Pin, 0.100 in"
MOD2: library part ADAFRUIT_FEATHER_COMMON_1, "Typical Adafruit Feather Pinout"
OBJ1: library part "DISTANZIALE - M2.5x0250", "DISTANZ. CIL. METALLO 5.1X2.5 9774025151R W.E SMT"
R1 R20: library part "RESCAXS80P640X160X50-16N - 8x100R", "Resistor array 100R 5% 2506"
R2 R4 R10 R11 R12 R15 R16: library part R0402-10k-1, "Resistor 10k ±1% 0402"
R3: library part R0402-470R-1, "Resistor 470R ±1% 0402"
R5: library part R1206-1M-1, "Resistor 1M ±1% 1206"
R6: library part R0402-15k-1, "Resistor 15k ±1% 0402"
R7 R8 R9: library part R0402-22R-1, "Resistor 22R ±1% 0402"
R13: library part R0402-1M1-1, "Resistor 1M1 ±1% 0402"
R14: library part R0402-180k-1, "Resistor 180k ±1% 0402"
R17: library part R0402-82k-1, "Resistor 82k ±1% 0402"
R18: library part R0402-100k-1, "Resistor 100k ±1% 0402"
R19: library part R0402-10M-1, "Resistor 10M ±1% 0402"
SW1 SW3 SW4: "Switch Slide N.O./N.C. SPDT Raised Slide 0.1A 24VDC J-Hook SMD Embossed T/R"
SW2: library part "Switch tact EVP-BB2A9B000", "SWITCH TACTILE SPST-NO 0.05A 15V"
TVS1: library part "TVS-UNI - SM6T6V8A - 6.8V/600W", "DIODO TVS TRANSIL UNIDIR. 600W 6.8V SM6T6V8A SMB SMT"
TVS2 TVS3: "PESD Series 25 W 5 V Uni-Directional Fivefold ESD Protection Diode Array SOT-666"
U1 U4: "2-Bit Bidirectional Voltage-Level Shifter for Open-Drain and Push-Pull Application 8-VSSOP -40 to 85"
U2: library part "BAT-CHARGE - BQ24210DQCT", "INTEGRATO BQ24210DQCT WSON10 TEXAS SMT"
U3: library part "BUCK-BOOST - TPS63020DSJR", "I.C. DC/DC CONVERTER TPS63020DSJR TEXAS VSON14 SMT"
U5 U6: "Analog Switch Quad SPDT Automotive 16-Pin Mini-QFN T/R"
U7: "IC REG BOOST ADJ 1A NANO 6UDFN"
U8: "IC REG BUCK PROG 300MA 8DSBGA"
U9: "IC REG LINEAR 3.3V 250MA SOT23-5"

## Free pads (board coordinates)
  round 0 hole 0.8 unplated: 0(3.3,105.25) 0(3.3,102.75) 0(4.3,-2.25) 0(4.3,0.25) 0(4.55,105.25) 0(4.55,102.75) 0(5.55,-2.25) 0(5.55,0.25) 0(5.8,105.25) 0(5.8,102.75) 0(6.8,-2.25) 0(6.8,0.25) 0(7.05,105.25) 0(7.05,102.75) 0(8.05,-2.25) 0(8.05,0.25) 0(8.3,105.25) 0(8.3,102.75) 0(9.3,-2.25) 0(9.3,0.25) 0(41.5,0.25) 0(41.5,-2.25) 0(42.5,102.75) 0(42.5,105.25) 0(42.75,0.25) 0(42.75,-2.25) 0(43.75,102.75) 0(43.75,105.25) 0(44,0.25) 0(44,-2.25) 0(45,102.75) 0(45,105.25) 0(45.25,0.25) 0(45.25,-2.25) 0(46.25,102.75) 0(46.25,105.25) 0(46.5,0.25) 0(46.5,-2.25) 0(47.5,102.75) 0(47.5,105.25)
  round 0 hole 2.54 unplated: M(2.54,11.11) M(2.54,28.96) M(48.26,11.11) M(48.26,28.96)
  round 0 hole 3.3 unplated: M(3.4,3.5) M(3.4,99.5) M(47.4,3.5) M(47.4,99.5)

## Via types
v1: diameter 0.6, hole 0.3, Top Layer to Bottom Layer, tented both sides, 506 vias

## Nets (pads, with @x,y where several pads share a name; then routed paths per layer and width w, separated by ;. In a path a pad name is that pad's centre, name@x,y a point inside that pad or via, vN(x,y) a via of type N, cw(c..) or ccw(c..) an arc to the next point about the centre after c; other vN are vias at no path point)
1V8: C20.1 C21.2 C28.2 C32.2 L1.2 L3.1 U7.5 U7.6 U8.C2 | length 8.5
  Bottom Layer w0.2: U8.C2@22.9,82.49 v1@23.65,82.49 ; C20.1@23.65,85.29 C20.1@23.725,85.365
  Bottom Layer w0.25: 14.7,81.045 16.075,81.045 16.2,81.17 U7.5@16.2,81.745
  Bottom Layer w0.35: U7.5@16.2,81.745 16.2,82.815 ; C28.2@16.775,83.54 16.85,83.465 U7.6@16.85,81.745
  Bottom Layer w0.4: v1(23.65,82.64) C20.1@23.65,85.29
\ALT_DFU_ACTIVE: J6.36 R18.1 U5.6 U5.14 | length 67.8
  Top Layer w0.15: v1(15.15,51.675) 16.65,50.175 24.675,50.175 25.9,48.95 J6.36@25.9,43.775
  Mid Layer 4 w0.15: v1(3.825,32.5) 4.875,31.45 4.875,26.55 v1(4.2,25.875)
  Bottom Layer w0.15: v1(3.825,32.5) 4.425,33.1 4.425,40.4 6.9,42.875 6.9,50.1 9,52.2 14.625,52.2 v1(15.15,51.675) ; v1(4.2,25.875) 4.2,24.825 3.525,24.15 3.525,20.775 6,18.3 U5.14@8.055,18.3 9.1,18.3 9.5,18.7 U5.6@10.545,18.7 11.82,18.7 v1(12.045,18.925)
  other v1: 9.3,18.5
ALT_DFU_BOOT: J6.32 U5.1 | length 69.7
  Top Layer w0.15: v1(6.075,26.625) 5.85,26.4 5.85,21.075 6.83,20.095 v1(8.55,20.095) ; v1(15.15,53.475) 17.25,51.375 25.2,51.375 26.9,49.675 J6.32@26.9,43.775
  Mid Layer 4 w0.15: v1(2.175,32.5) 2.75,33.075 4.275,33.075 5.325,32.025 5.325,27.375 v1(6.075,26.625)
  Bottom Layer w0.15: v1(2.175,32.5) 3.525,33.85 3.525,40.65 5.25,42.375 5.25,52.2 6,52.95 14.625,52.95 v1(15.15,53.475) ; U5.1@8.7,19.345 v1@8.7,20.095
ALT_DFU_RESET: J6.34 U5.13 | length 67.5
  Top Layer w0.15: v1(15.15,52.575) 16.95,50.775 24.9,50.775 26.4,49.275 J6.34@26.4,43.775
  Mid Layer 4 w0.15: v1(3,32.5) 4.425,31.075 4.425,26.925 3.6,26.1 v1(3.6,25.2)
  Bottom Layer w0.15: v1(3,32.5) 3.975,33.475 3.975,40.525 5.625,42.175 5.625,51.975 6.225,52.575 10.65,52.575 v1(15.15,52.575) ; v1(3.6,25.2) 3.15,24.75 3.15,20.625 5.875,17.9 U5.13@8.055,17.9
ALT_DFU_RX: J6.41 U5.5 | length 58
  Top Layer w0.15: v1(6.6,27.3) 5.925,27.3 5.475,26.85 5.475,20.85 6.825,19.5 9.525,19.5 9.975,19.05 11.27,19.05 v1(12.045,19.825) ; v1(14.2,44.925) 13.875,44.6 13.875,41.125 14.725,40.275 22.15,40.275 24.65,37.775 J6.41@24.65,36.225
  Mid Layer 4 w0.15: v1(6,34.725) 7.875,32.85 7.875,28.575 v1(6.6,27.3)
  Bottom Layer w0.15: v1(6,34.725) 6,38.85 11.55,44.4 13.675,44.4 v1(14.2,44.925) ; U5.5@10.545,19.1 11.32,19.1 v1(12.045,19.825)
ALT_DFU_TX: J6.43 U5.9 | length 57
  Top Layer w0.15: v1(5.925,27.9) 5.1,27.075 5.1,20.625 6.6,19.125 9.375,19.125 10.05,18.45 v1(10.05,16.905) ; v1(13.2,44.925) 13.5,44.625 13.5,40.95 14.55,39.9 21.975,39.9 24.15,37.725 J6.43@24.15,36.225
  Mid Layer 4 w0.15: v1(5.325,34.05) 6.075,34.05 7.425,32.7 7.425,28.875 6.45,27.9 v1(5.925,27.9)
  Bottom Layer w0.15: v1(5.325,34.05) 5.325,39 11.25,44.925 v1(13.2,44.925) ; v1@9.9,16.905 U5.9@9.9,17.655
ATTN_P: J6.54 R1.11 | length 18.4
  Top Layer w0.15: J6.54@21.4,43.775 21.4,45.875 v1(22.2,46.675)
  Bottom Layer w0.15: R1.11@16.5,59.1 17.1,59.1 22.2,54 v1(22.2,46.675)
AUX_CHARGING: J6.38 U2.8 | length 66.4
  Top Layer w0.15: J6.38@25.4,43.775 25.4,48.625 24.375,49.65 16.15,49.65 14.475,51.325 14.475,74.7 16.719,76.944 21.15,76.944 v1(33.553,89.347) v1@33.553,89.128
  Bottom Layer w0.15: v1@33.703,89.347 U2.8@33.703,90.097
AUX_EN_P: J6.56 R1.12 | length 17.1
  Top Layer w0.15: J6.56@20.9,43.775 20.9,46.175 v1(21.4,46.675)
  Bottom Layer w0.15: R1.12@16.5,58.3 17.1,58.3 21.4,54 v1(21.4,46.675)
AUX_RX_P: J6.58 R1.13 | length 15.9
  Top Layer w0.15: J6.58@20.4,43.775 20.4,46.475 v1(20.6,46.675)
  Bottom Layer w0.15: R1.13@16.5,57.5 17.1,57.5 20.6,54 v1(20.6,46.675)
AUX_TX_P: J6.60 R1.14 | length 14.7
  Top Layer w0.15: v1(19.8,46.675) 19.9,46.575 J6.60@19.9,43.775
  Bottom Layer w0.15: R1.14@16.5,56.7 17.1,56.7 19.8,54 v1(19.8,46.675)
CTX: J6.49 J11.2 | length 19.1
  Top Layer w0.15: J6.49@22.65,36.225 22.65,35.1 23.1,34.65 36.833,34.65 J11.2@39.394,37.211
D_N: J4.2 J6.9 TVS3.4 | length 75.6
  Top Layer w0.15: J6.9@32.65,36.225 32.65,37.375 33.1,37.825 v1(33.1,38.475)
  Top Layer w0.178: v1(13.6,5.9) 13.75,5.75 J4.2@13.75,4.775
  Bottom Layer w0.15: v1(13.6,5.9) 6.1,5.9 4.65,7.35 4.65,12.6 2.175,15.075 2.175,25.5 4.65,27.975 4.65,32.475 12.25,40.075 16.075,40.075 17.4,41.4 30.175,41.4 v1(33.1,38.475) ; TVS3.4@13.825,4.005 v1@13.825,5.85
D_P: J4.3 J6.7 TVS3.5 | length 74.9
  Top Layer w0.15: J6.7@33.15,36.225 33.15,37.275 v1(33.75,37.875)
  Top Layer w0.178: J4.3@14.4,4.775 v1(14.4,5.9)
  Bottom Layer w0.15: TVS3.5@14.325,4.005 v1@14.325,5.825 ; v1(14.4,5.9) 13.85,6.45 6.375,6.45 5.2,7.625 5.2,12.8 2.7,15.3 2.7,25.275 5.2,27.775 5.2,32.22 12.536,39.556 16.446,39.556 17.765,40.875 29.775,40.875 32.775,37.875 v1(33.75,37.875)
  Bottom Layer w0.178: v1@14.325,5.825 v1(14.4,5.9)
DFU_SW: SW4.2 U6.6 U6.14 | length 65.5
  Top Layer w0.15: v1(9.3,25.5) 9.3,23.85 8.85,23.4 8.85,22.95 9.15,22.65 12.675,22.65 13.8,21.525 16.295,21.525 23.15,28.38 23.15,32.575 24.475,33.9 38.975,33.9 41.325,36.25 41.325,45.745 39.145,47.925 37.564,47.925 v1(35.408,50.081)
  Bottom Layer w0.15: U6.14@8.055,25.3 9.1,25.3 v1(9.3,25.5) 9.5,25.7 U6.6@10.545,25.7
  Bottom Layer w0.3: v1(35.408,50.081) SW4.2@35.408,51.356
EN_F_BAT: C10.2 C15.2 R18.2 SW3.2 SW4.3 U3.12 U4.6 U5.10 U6.10 | length 194.5
  Top Layer w0.15: v1(7.575,45.6) 7.575,40.65 9.9,38.325 9.9,35.925 9.225,35.25 9.225,34.275 10.5,33 12.15,33 12.675,32.475 12.675,28.575 13.125,28.125 v1(13.125,27.075) ; v1(9.5,23.23) 12.975,23.23 14.1,22.105 16.105,22.105 22.725,28.725 22.725,32.775 24.225,34.275 38.82,34.275 40.95,36.405 40.95,45.445 38.92,47.475 36.739,47.475 v1(33.658,50.556) ; v1(9.725,16.155) 10.355,15.525 12.375,15.525 v1(13.125,16.275)
  Bottom Layer w0.15: R18.2@6.5,17.35 C15.2@6.5,16.5 7.4,15.6 9.17,15.6 v1(9.725,16.155) 9.5,16.38 U5.10@9.5,17.655 ; v1(7.575,45.6) 8,46.025 8,49.475 9.525,51 15.45,51 15.825,51.375 15.825,61.375 15.4,61.8 SW3.2@15.4,64.85 15.4,71.5 13.23,73.67 10.2,73.67 ; U6.10@9.5,24.655 v1(9.5,23.23) 10.43,23.23 C10.2@10.45,23.25 ; U4.6@10.855,13.95 13.275,13.95 14.1,14.775 v1@14.1,21.9 ; v1(13.125,16.275) 14.025,16.275 ; v1(13.125,27.075) 14.1,26.1 v1(14.1,22.125) ; SW4.3@33.658,49.056 v1(33.658,50.556)
  Bottom Layer w0.2: 10.2,73.67 7.8,73.67 5.4,76.07 5.4,83.42 6.435,84.455 13.205,84.455 15.32,86.57 27.43,86.57 31.975,82.025 U3.12@32.425,82.025
F_3V3: C12.1 J7.3 J8.3 J10.1 MOD1L.2 R10.2 R15.2 R16.1 U1.6 U1.7 | length 165.5
  Top Layer w0.3: v1(24.9,3.389) J7.3@24.9,4.589 ; v1(35.9,3.389) J8.3@35.9,4.589
  Top Layer w0.4: J10.1@1.4,93 4.8,89.6 4.8,87.075 5.625,86.25 7.555,86.25 10.105,88.8 26.5,88.8 30.025,92.325 v1(47.7,92.325) ; v1(39.37,18.15) 41.325,20.105 41.325,27.825 41.91,28.41 MOD1L.2@41.91,30.16 ; MOD1L.2@41.91,32.01 45.15,35.25 45.15,87.525 v1(47.7,90.075)
  Bottom Layer w0.25: v1(24.9,3.389) v1(35.9,3.389) 38.614,3.389 39.375,4.15 39.375,7.15 ; C12.1@38.975,9.45 39.375,9.45 ; v1(39.37,18.15) 39.375,18.145 39.375,9.45 ; R16.1@39.775,9.45 39.375,9.45 ; U1.7@40.905,7.15 39.375,7.15 ; R10.2@42.5,7.65 U1.6@40.905,7.65 39.375,7.65 ; 39.375,7.15 39.375,7.65 ; 39.375,7.65 39.375,9.45
  Bottom Layer w0.4: v1(47.7,90.075) v1(47.7,92.325)
F_A0: J9.23 MOD1L.5 | length 19.1
  Bottom Layer w0.15: MOD1L.5@34.29,30.16 34.29,32.04 35.1,32.85 43.05,32.85 47.32,37.12 J9.23@49.4,37.12
F_A1: J9.22 MOD1L.6 | length 22.7
  Bottom Layer w0.15: MOD1L.6@31.75,30.16 31.75,32.125 32.85,33.225 42.825,33.225 49.26,39.66 J9.22@49.4,39.66
F_A2: J9.21 MOD1L.7 | length 29.1
  Top Layer w0.15: MOD1L.7@29.21,30.16 MOD1L.7@29.21,31.985
  Bottom Layer w0.15: MOD1L.7@29.21,30.16 29.21,31.999 30.736,33.525 42.525,33.525 47.85,38.85 47.85,40.65 J9.21@49.4,42.2
F_A3: J9.20 MOD1L.8 | length 32
  Top Layer w0.15: MOD1L.8@26.67,30.16 MOD1L.8@26.67,31.995
  Bottom Layer w0.15: MOD1L.8@26.67,32 28.57,33.9 42.3,33.9 47.475,39.075 47.475,42.815 J9.20@49.4,44.74
F_A4: J9.19 MOD1L.9 | length 36.7
  Bottom Layer w0.15: MOD1L.9@24.13,31.905 26.5,34.275 42.075,34.275 47.1,39.3 47.1,44.98 J9.19@49.4,47.28
  Bottom Layer w0.2: MOD1L.9@24.13,30.16 MOD1L.9@24.13,31.905
F_A5: J9.18 MOD1L.10 | length 41.5
  Bottom Layer w0.15: MOD1L.10@21.59,32.015 24.225,34.65 41.85,34.65 46.725,39.525 46.725,47.145 J9.18@49.4,49.82
  Bottom Layer w0.2: MOD1L.10@21.59,30.16 MOD1L.10@21.59,32.015
F_AREF: J9.24 MOD1L.3 | length 14.7
  Bottom Layer w0.15: MOD1L.3@39.37,30.16 39.37,29.855 40.275,28.95 42.525,28.95 43.125,29.55 43.125,32.4 45.305,34.58 J9.24@49.4,34.58
F_B0: MOD1L.16 U6.16 | length 4.9
  Bottom Layer w0.15: MOD1L.16@6.35,30.16 6.35,29.725 7.575,28.5 7.575,26.375 7.85,26.1 U6.16@8.055,26.1
F_B0_SW: J9.12 U5.15 | length 80.3
  Top Layer w0.15: v1(6.825,21.6) 6.825,26 7.5,26.675 7.5,37.275 v1(6.975,37.8)
  Bottom Layer w0.15: v1(6.825,21.6) 7.2,21.225 7.2,19.16 7.66,18.7 U5.15@8.055,18.7 ; v1(6.975,37.8) 6.975,38.925 12.15,44.1 38.025,44.1 42.275,48.35 42.275,57.935 J9.12@49.4,65.06
F_BAT: DS5.3 MOD1R.1 | length 73.1
  Top Layer w0.4: v1(41.85,18.9) 43.125,20.175 43.125,32.1 44.325,33.3 v1(44.85,33.3)
  Top Layer w0.6: v1(39.3,68.475) v1(40.05,68.475) v1(40.8,68.475) 42,67.275 v1(42,36.675)
  Mid Layer 4 w0.6: v1(42,36.675) 42,36.15 v1(44.85,33.3)
  Bottom Layer w0.4: DS5.3@39.3,69.975 DS5.3@39.3,71.475 ; DS5.3@40.05,69.975 DS5.3@40.05,71.475 ; DS5.3@40.8,69.975 DS5.3@40.8,71.475
  Bottom Layer w0.6: MOD1R.1@34.29,9.84 34.29,13.59 37.575,16.875 37.575,18.24 38.235,18.9 v1(41.85,18.9)
F_D5: J9.5 MOD1R.10 | length 115.7
  Top Layer w0.15: v1(46.8,56.625) 46.8,80.24 J9.5@49.4,82.84
  Bottom Layer w0.15: MOD1R.10@11.43,10.08 13.025,11.675 17.8,11.675 19.875,13.75 19.875,21.225 12.15,28.95 11,28.95 10.5,29.45 10.5,32.85 16.35,38.7 24,38.7 24.45,39.15 30.524,39.15 33.524,36.15 36.75,36.15 37.875,37.275 37.875,41.7 44.225,48.05 44.225,54.05 v1(46.8,56.625)
F_D6: J9.6 MOD1R.9 | length 111.4
  Top Layer w0.15: v1(46.8,55.65) 47.4,56.25 47.4,78.3 J9.6@49.4,80.3
  Bottom Layer w0.15: MOD1R.9@13.97,9.84 13.97,10.22 15,11.25 18,11.25 20.325,13.575 20.325,21.305 12.3,29.33 12.3,34.125 16.575,38.4 24.225,38.4 24.6,38.775 30.475,38.775 33.475,35.775 40.27,35.775 40.95,36.455 40.95,44.25 44.6,47.9 44.6,53.45 v1(46.8,55.65)
F_D9: J9.7 MOD1R.8 | length 95.6
  Top Layer w0.15: MOD1R.8@16.51,9.84 23.07,16.4 34.178,16.4 38.3,20.522 38.3,22.934 35.4,25.834 35.4,32.5 36.075,33.175 40.034,33.175 43.05,36.191 43.05,76.415 v1(44.4,77.765)
  Bottom Layer w0.15: v1@44.475,77.76 J9.7@49.4,77.76
F_D10: J9.8 MOD1R.7 | length 90.9
  Top Layer w0.15: MOD1R.7@19.05,9.84 25.21,16 34.344,16 38.7,20.356 38.7,23.1 35.775,26.025 35.775,32.325 36.3,32.85 40.275,32.85 43.425,36 43.425,74.25 v1(44.4,75.225)
  Bottom Layer w0.15: v1@44.475,75.22 J9.8@49.4,75.22
F_D11: J9.9 MOD1R.6 | length 81.4
  Top Layer w0.15: MOD1R.6@21.59,9.84 27.35,15.6 34.509,15.6 39.275,20.366 39.275,27.766 40.425,28.916 40.425,32.366 43.8,35.741 43.8,72.075 v1(44.4,72.675)
  Bottom Layer w0.15: v1@44.475,72.68 J9.9@49.4,72.68
F_D12: J9.10 MOD1R.5 | length 77.1
  Top Layer w0.15: MOD1R.5@24.13,9.84 24.13,10.18 29.15,15.2 34.675,15.2 39.675,20.2 39.675,27.6 40.825,28.75 40.825,32.2 44.175,35.55 44.175,69.84 v1@44.475,70.14
  Mid Layer 4 w0.2: MOD1R.5@24.003,9.967 MOD1R.5@24.13,9.84
  Bottom Layer w0.15: v1@44.475,70.14 J9.10@49.4,70.14
  other v1: 44.4,70.14
F_D13: J9.11 MOD1R.4 | length 93.5
  Top Layer w0.15: MOD1R.4@26.67,8.07 26.1,7.5 26.1,7.1 25.225,6.225 23.85,6.225 23.325,5.7 23.325,3.075 24,2.4 40.35,2.4 43.875,5.925 43.875,11.375 46.425,13.925 46.425,54.3 47.775,55.65 47.775,65.975 J9.11@49.4,67.6
  Mid Layer 4 w0.25: MOD1R.4@26.67,9.84 MOD1R.4@26.771,9.84
F_EN: J9.2 MOD1R.2 | length 95.2
  Top Layer w0.15: v1(28.275,23.1) 30.075,23.1 33.15,26.175 v1(33.15,32.475) ; v1(36.9,37.8) 36.9,38.175 37.575,38.85 37.575,44.55 v1(38.325,45.3)
  Mid Layer 4 w0.15: v1(33.15,32.475) 36.9,36.225 v1(36.9,37.8)
  Bottom Layer w0.15: v1(28.275,23.1) 28.275,20.025 26.7,18.45 26.7,15.3 27.15,14.85 30.6,14.85 31.75,13.7 MOD1R.2@31.75,9.84 ; v1(38.325,45.3) 41.85,48.825 41.85,58.15 43.725,60.025 43.725,78.225 47.625,82.125 47.625,88.685 J9.2@49.4,90.46
F_MISO: J9.15 MOD1L.13 | length 60.9
  Top Layer w0.15: v1(11.175,34.425) 11.7,33.9 12.9,33.9 13.97,32.83 MOD1L.13@13.97,32.005
  Bottom Layer w0.15: v1(11.175,34.425) 15.75,39 23.775,39 24.3,39.525 30.65,39.525 33.65,36.525 36.55,36.525 37.475,37.45 37.475,41.9 43.825,48.25 43.825,54.75 46.515,57.44 J9.15@49.4,57.44
F_MOSI: J9.16 MOD1L.12 | length 50.4
  Bottom Layer w0.15: MOD1L.12@16.51,31.96 19.95,35.4 40.425,35.4 41.325,36.3 41.325,44.1 45,47.775 45,50.5 J9.16@49.4,54.9
  Bottom Layer w0.2: MOD1L.12@16.51,30.16 MOD1L.12@16.51,31.96
F_NRST: MOD1L.1 U6.12 | length 42.8
  Top Layer w0.15: v1(8.55,23.905) 8.55,22.725 9,22.275 12.525,22.275 13.65,21.15 16.575,21.15 23.925,28.5 v1(27.15,28.5)
  Bottom Layer w0.15: v1@8.7,23.905 U6.12@8.7,24.655 ; v1(27.15,28.5) 27.675,27.975 42.55,27.975 44.45,29.875 MOD1L.1@44.45,30.16
F_NRST_SW: J9.1 U5.11 | length 109.4
  Top Layer w0.15: v1(8.875,16.155) 10.255,14.775 13.425,14.775 13.75,15.1 13.75,20.05 14.4,20.7 16.8,20.7 23.963,27.863 27.488,27.863 27.975,28.35 27.975,32.175 29.325,33.525 39.755,33.525 42.675,36.445 42.675,86.275 J9.1@49.4,93
  Bottom Layer w0.15: v1(8.875,16.155) 9.1,16.38 U5.11@9.1,17.655
F_RX: MOD1L.14 U6.8 | length 7.7
  Top Layer w0.15: v1(11.295,24.675) 12.15,24.675 12.525,25.05 12.525,28.05 11.43,29.145 MOD1L.14@11.43,30.16
  Bottom Layer w0.15: U6.8@10.545,24.9 v1@11.295,24.9
F_RX_SW: J9.14 U5.7 | length 83.9
  Top Layer w0.15: v1(6.75,35.4) 7.2,34.95 7.2,26.95 6.225,25.975 6.225,21.3 6.75,20.775 8.74,20.775 10.065,19.45 10.9,19.45 11.85,20.4 12.375,20.4 12.75,20.025 12.75,18.78 v1(12.045,18.075)
  Bottom Layer w0.15: v1(6.75,35.4) 6.75,36.45 13.65,43.35 38.325,43.35 43.05,48.075 43.05,55.115 47.915,59.98 J9.14@49.4,59.98 ; U5.7@10.545,18.3 11.82,18.3 v1(12.045,18.075)
F_SCK: J9.17 MOD1L.11 | length 46.2
  Bottom Layer w0.15: MOD1L.11@19.05,31.95 22.125,35.025 41.7,35.025 46.35,39.675 46.35,49.31 J9.17@49.4,52.36
  Bottom Layer w0.2: MOD1L.11@19.05,30.16 MOD1L.11@19.05,31.95
F_SCL: MOD1R.11 R12.1 U1.4 U4.1 | length 40.4
  Top Layer w0.15: MOD1R.11@9.1,7.9 10.376,6.624 24.997,6.624 25.65,7.277 25.65,10.425 26.325,11.1 37.675,11.1 v1(38.5,10.275)
  Bottom Layer w0.15: U4.1@8.045,12.95 8.425,12.95 8.84,12.535 MOD1R.11@8.84,9.84 ; R12.1@8.35,11.675 8.84,11.675 ; U1.4@38.095,8.15 38.095,8.595 38.5,9 v1(38.5,10.275)
F_SDA: MOD1R.12 R11.1 U1.5 U4.8 | length 49.9
  Top Layer w0.15: MOD1R.12@6.35,9.84 6.35,10.05 7.4,11.1 10.2,11.1 ; v1(11.9,11.675) 11.325,11.1 10.2,11.1 ; 35.174,11.476 26.026,11.476 25.174,10.624 25.174,7.474 24.8,7.1 10.7,7.1 10.2,7.6 10.2,11.1 ; 35.175,11.475 39.075,11.475 v1(40.275,10.275)
  Bottom Layer w0.15: U4.8@10.855,12.95 11.65,12.95 11.9,12.7 v1(11.9,11.675) R11.1@11.15,11.675 ; v1(40.275,10.275) 40.275,8.4 40.525,8.15 U1.5@40.905,8.15
F_TX: MOD1L.15 U6.4 | length 4.6
  Bottom Layer w0.15: MOD1L.15@8.89,30.16 8.89,28.985 10.275,27.6 10.275,26.85 9.9,26.475 U6.4@9.9,26.325
F_TX_SW: J9.13 U5.3 | length 81.2
  Top Layer w0.15: v1(7.65,38.7) 8.25,38.1 8.25,33.975 9.975,32.25 9.975,29.1 10.8,28.275 10.8,27.15 10.125,26.475 8.695,26.475 7.65,25.43 7.65,22.425 8.55,21.525 9.795,21.525 v1(10.475,20.845)
  Bottom Layer w0.15: v1(7.65,38.7) 12.675,43.725 38.175,43.725 42.675,48.225 42.675,55.795 J9.13@49.4,62.52 ; U5.3@9.5,19.345 9.5,19.87 v1(10.475,20.845)
F_VIO: C11.1 C14.1 C34.2 R11.2 R12.2 U1.3 U4.7 U9.5 | length 46.1
  Bottom Layer w0.2: R12.2@9.35,11.675 R11.2@10.15,11.675 ; C14.1@11.425,15.4 10.45,15.4 9.75,14.7 9.75,13.45 ; U9.5@15.147,14.625 15.147,13.45 ; C34.2@15.4,12.675 15.4,13.197 15.147,13.45 ; C11.1@36.65,7.9 35.8,7.9 34.875,6.975 10.875,6.975 10.15,7.7 R11.2@10.15,11.675 ; 9.75,13.45 9.75,12.75 10.15,12.35 R11.2@10.15,11.675 ; 9.75,13.45 U4.7@10.855,13.45 15.147,13.45
  Bottom Layer w0.25: C11.1@36.65,7.9 36.9,7.65 U1.3@38.095,7.65
F_VUSB: DS6.2 MOD1R.3 | length 2.2
  Bottom Layer w1.1: MOD1R.3@29.21,9.84 DS6.2@29.21,12.075